# EAGLE board Main (EAGLE 6.3)
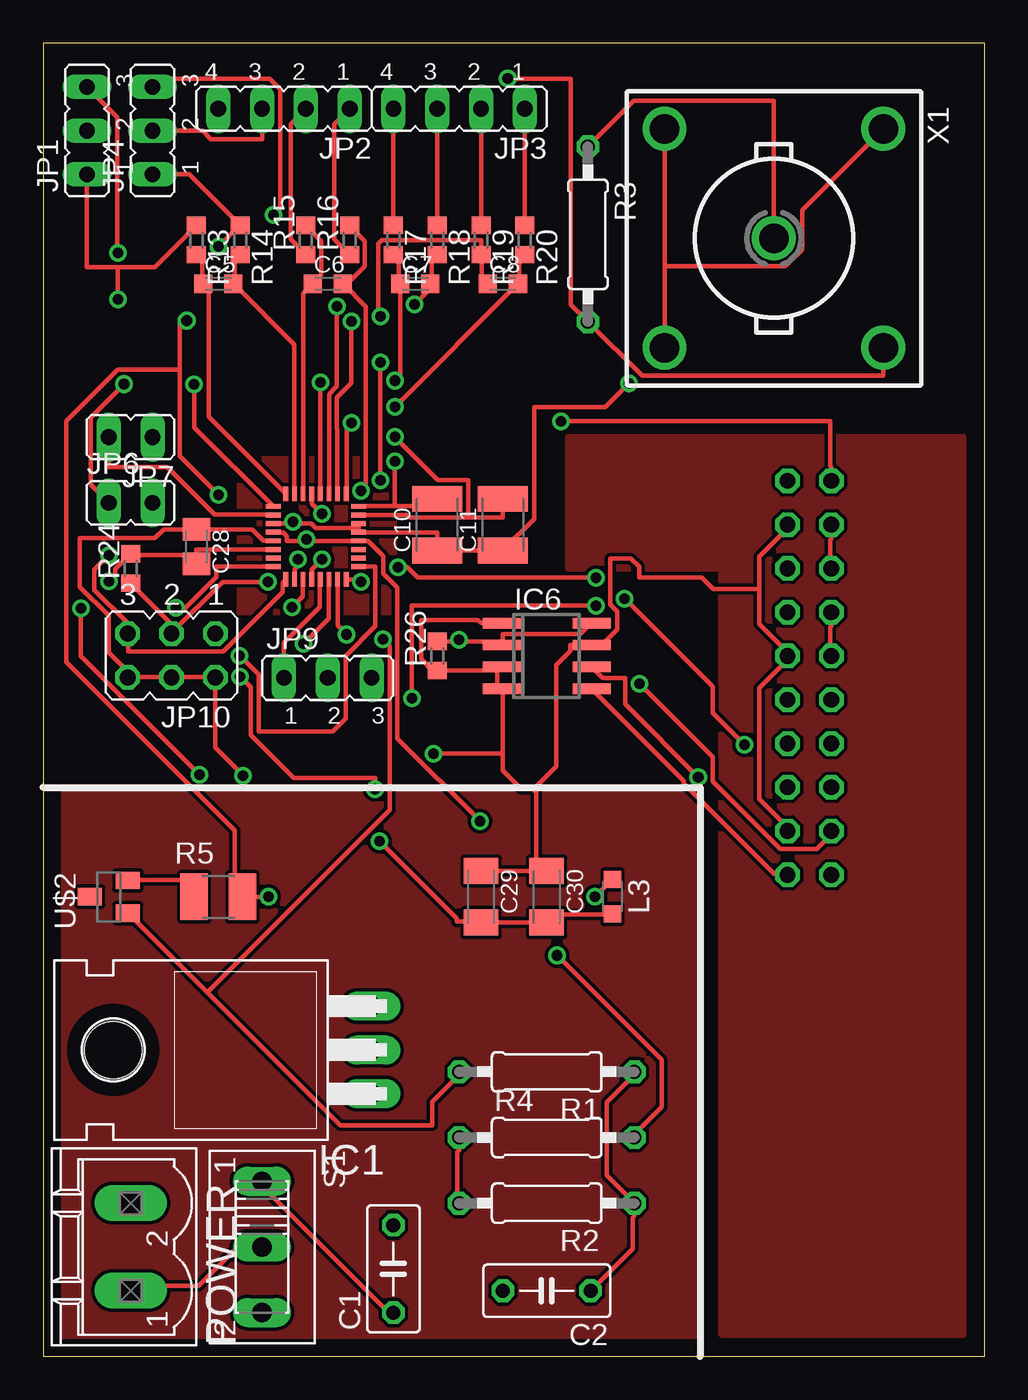
[diagram p0: board, top side]
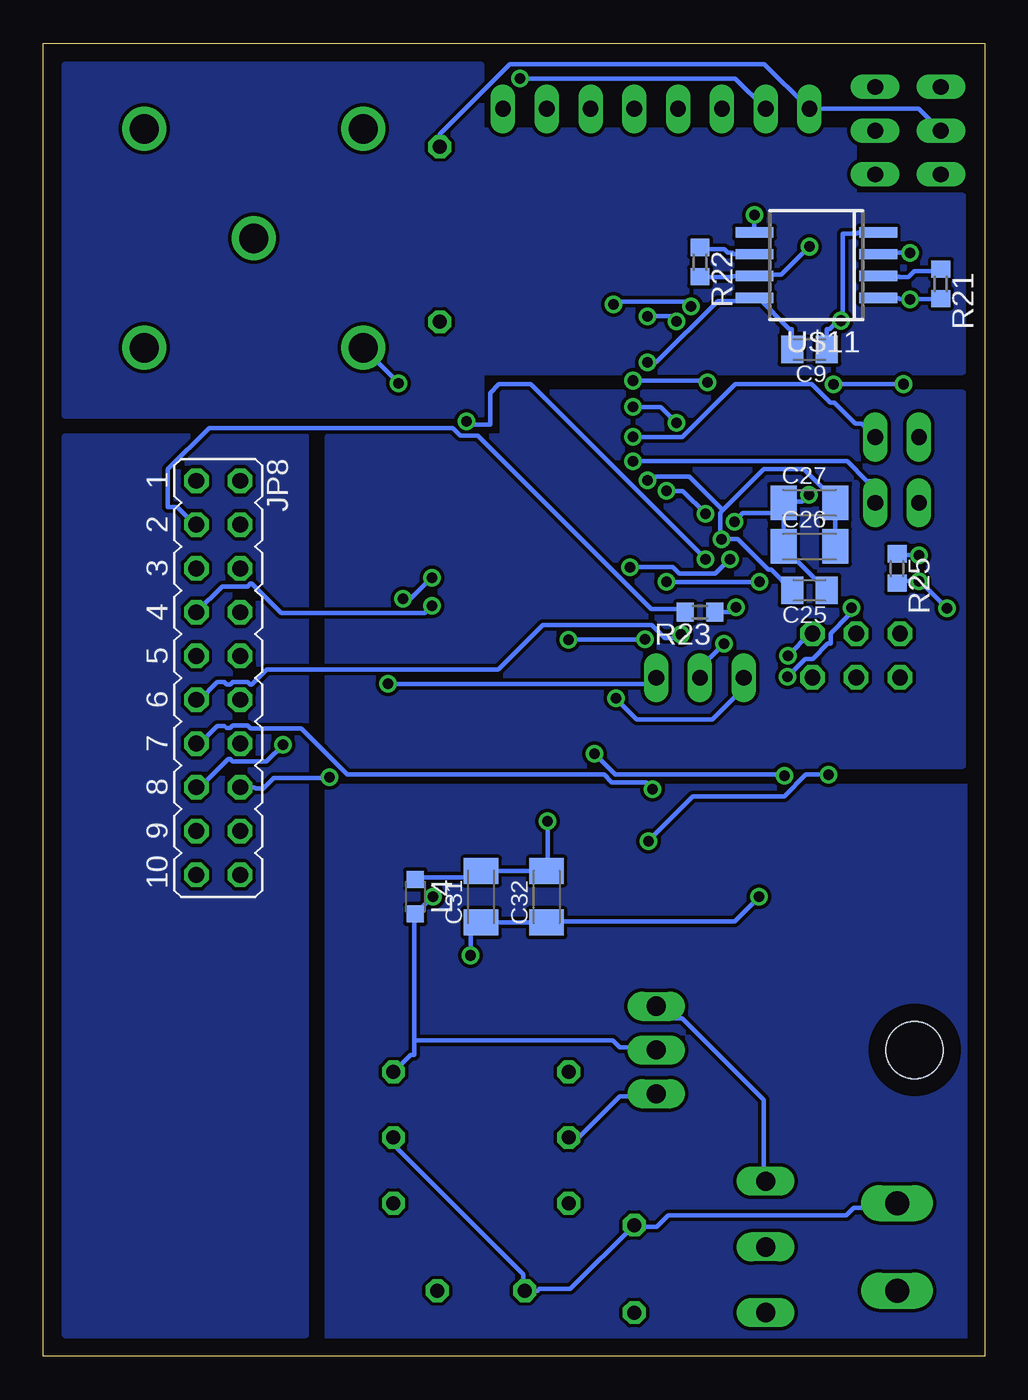
[diagram p1: board, bottom side, seen from below]

Size 54.61 x 76.2 mm. Coordinates in mm from the lower left corner, seen from the top.
Outline: 0,0 54.61,0 54.61,76.2 0,76.2 0,0
Copper layers (1*16): Top 0.035mm / dielectric 1.5mm / Bottom 0.035mm
Design rules "default": minimum track width 10mil, minimum drill 24mil, track to track 8mil, track to pad 8mil, pad to pad 8mil, via to via 8mil, smd to smd 8mil, copper to edge 40mil, drill to drill 8mil, minimum pad ring 10mil, minimum via ring 8mil, stop-mask expansion 4mil, vias tented up to drill 0mil, thermal gap 10mil

## Footprints (pad centres in the part's own frame; a part is rotated, then mirrored left to right if it is on the bottom)
C050-030X075 = drill 0.813 octagon: 1 -2.54,0; 2 2.54,0
C0603K = smd 1.05 x 1.08: 1 -0.875,0; 2 0.875,0
C0805K = smd 1.3 x 1.6: 1 -1,0; 2 1,0
C1210K = smd 1.5 x 2.9: 1 -1.5,0; 2 1.5,0
C1206K = smd 1.5 x 2: 1 -1.5,0; 2 1.5,0
TO220H = drill 1.118 long: 1 -2.54,-10.16; 2 0,-10.16; 3 2.54,-10.16 | hole 3.302: 0,4.826
SO-08 = smd 0.6 x 2.2: 1 -1.905,-2.6; 2 -0.635,-2.6; 3 0.635,-2.6; 4 1.905,-2.6; 5 1.905,2.6; 6 0.635,2.6; 7 -0.635,2.6; 8 -1.905,2.6
JP2 = drill 0.914 long: 1 -2.54,0; 2 0,0; 3 2.54,0
JP4 = drill 0.914 long: 1 -3.81,0; 2 -1.27,0; 3 1.27,0; 4 3.81,0
JP1 = drill 0.914 long: 1 0,-1.27; 2 0,1.27
JP10Q = drill 0.914 octagon: 1 -11.43,-1.27; 2 -11.43,1.27; 3 -8.89,-1.27; 4 -8.89,1.27; 5 -6.35,-1.27; 6 -6.35,1.27; 7 -3.81,-1.27; 8 -3.81,1.27; 9 -1.27,-1.27; 10 -1.27,1.27; 11 1.27,-1.27; 12 1.27,1.27; 13 3.81,-1.27; 14 3.81,1.27; 15 6.35,-1.27; 16 6.35,1.27; 17 8.89,-1.27; 18 8.89,1.27; 19 11.43,-1.27; 20 11.43,1.27
JP3Q = drill 0.914 octagon: 1 -2.54,-1.27; 2 -2.54,1.27; 3 0,-1.27; 4 0,1.27; 5 2.54,-1.27; 6 2.54,1.27
L2012C = smd 1 x 1: 1 -1,0; 2 1,0
MSTBV2 = drill 1.397 long: 1 -2.54,0; 2 2.54,0
0207/10 = drill 0.813 octagon: 1 -5.08,0; 2 5.08,0
R3225 = smd 1.6 x 2.7: 1 -1.4,0; 2 1.4,0
R0603 = smd 1 x 1.1: 1 -0.85,0; 2 0.85,0
255SB = drill 1.118 long: 1 -3.81,0; 2 0,0; 3 3.81,0
ADS8363 = smd 0.28 x 0.85: P$1_ 0.725,0.725; P$2_ 1.225,0.725; P$3_ 1.725,0.725; P$4_ 2.225,0.725; P$5_ 2.725,0.725; P$6_ 3.225,0.725; P$7_ 3.725,0.725; P$8_ 4.225,0.725; P$17_ 4.225,-4.225; P$18_ 3.725,-4.225; P$19_ 3.225,-4.225; P$20_ 2.725,-4.225; P$21_ 2.225,-4.225; P$22_ 1.725,-4.225; P$23_ 1.225,-4.225; P$24_ 0.725,-4.225 | smd 0.85 x 0.28: P$9_ 4.95,0; P$10_ 4.95,-0.5; P$11_ 4.95,-1; P$12_ 4.95,-1.5; P$13_ 4.95,-2; P$14_ 4.95,-2.5; P$15_ 4.95,-3; P$16_ 4.95,-3.5; P$25_ 0,-3.5; P$26_ 0,-3; P$27_ 0,-2.5; P$28_ 0,-2; P$29_ 0,-1.5; P$30_ 0,-1; P$31_ 0,-0.5; P$32_ 0,0
SOT23 = smd 1 x 1.4: 1 -0.95,-1.1; 2 0.95,-1.1; 3 0,1.1
SOP-08 = smd 0.6 x 2.2: 1 -1.905,-3.6; 2 -0.635,-3.6; 3 0.635,-3.6; 4 1.905,-3.6; 5 1.905,3.575; 6 0.635,3.575; 7 -0.635,3.575; 8 -1.905,3.575
B35N57 = drill 1.7: 1 0,0; 2 6.35,6.35; 3 -6.35,6.35; 4 -6.35,-6.35; 5 6.35,-6.35

## Placement (x,y rotation side)
C1  [C050-030X075]  20.32,5.08 90 top
C2  [C050-030X075]  29.21,3.81 180 top
C5  3900pF  [C0603K]  10.16,62.23 0 top
C6  3900pF  [C0603K]  16.51,62.23 0 top
C7  3900pF  [C0603K]  21.59,62.23 0 top
C8  3900pF  [C0603K]  26.67,62.23 0 top
C9  1uF  [C0805K]  10.16,58.42 180 bottom
C10  10uF  [C1210K]  22.86,48.26 90 top
C11  10uF  [C1210K]  26.67,48.26 90 top
C25  1uF  [C0805K]  10.16,44.45 180 bottom
C26  0.1uF  [C1206K]  10.16,46.99 0 bottom
C27  0.1uF  [C1206K]  10.16,49.53 0 bottom
C28  1uF  [C0805K]  8.89,46.99 270 top
C29  0.1uF  [C1206K]  25.4,26.67 270 top
C30  0.1uF  [C1206K]  29.21,26.67 270 top
C31  0.1uF  [C1206K]  29.21,26.67 90 bottom
C32  0.1uF  [C1206K]  25.4,26.67 90 bottom
IC1  317T  [TO220H]  8.89,17.78 90 top
IC6  24LC256T  [SO-08]  29.21,40.64 270 top
JP1  [JP2]  2.54,71.12 90 top
JP2  [JP4]  13.97,72.39 180 top
JP3  [JP4]  24.13,72.39 180 top
JP4  [JP2]  6.35,71.12 90 top
JP6  [JP1]  5.08,49.53 270 top
JP7  [JP1]  5.08,53.34 90 top
JP8  [JP10Q]  44.45,39.37 270 bottom
JP9  [JP2]  16.51,39.37 0 top
JP10  [JP3Q]  7.45,40.67 180 top
L3  [L2012C]  33.02,26.67 270 top
L4  [L2012C]  33.02,26.67 270 bottom
POWER  MSTBV2  [MSTBV2]  5.08,6.35 90 top
R1  150  [0207/10]  29.21,16.51 180 top
R2  240  [0207/10]  29.21,8.89 180 top
R3  1M  [0207/10]  31.6,65.1 270 top
R4  725  [0207/10]  29.21,12.7 0 top
R5  0  [R3225]  10.16,26.67 0 top
R13  49.9  [R0603]  8.89,64.77 270 top
R14  49.9  [R0603]  11.43,64.77 270 top
R15  49.9  [R0603]  15.24,64.77 90 top
R16  49.9  [R0603]  17.78,64.77 90 top
R17  49.9  [R0603]  20.32,64.77 270 top
R18  49.9  [R0603]  22.86,64.77 270 top
R19  49.9  [R0603]  25.4,64.77 270 top
R20  49.9  [R0603]  27.94,64.77 270 top
R21  49.9  [R0603]  2.54,62.23 270 bottom
R22  49.9  [R0603]  16.51,63.5 270 bottom
R23  33  [R0603]  16.51,43.18 180 bottom
R24  10K  [R0603]  5.08,45.72 90 top
R25  10K  [R0603]  5.08,45.72 270 bottom
R26  33  [R0603]  22.86,40.64 90 top
S1  [255SB]  12.7,6.35 270 top
U$1  ADS8386  [ADS8363]  13.35,49.32 0 top
U$2  LM4040  [SOT23]  3.81,26.67 90 top
U$11  OPA2365  [SOP-08]  9.77,63.32 90 bottom
X1  B35N57  [B35N57]  42.39,64.87 270 top

## Library data of the parts
C1 C2 L3 L4 R3 = resistor
C5-C11 C25-C32 R1 R2 R4 R5 R13-R26 = rcl
IC1 = linear
IC6 = microchip; MF: MICROCHIP; MPN: 24LC128-I/SNG; OC_FARNELL: 9757937; OC_NEWARK: 30H1511
JP1-JP4 JP6-JP10 = jumper
POWER = con-phoenix-508; MPN: MSTBV 2,5/2-GF-5.08; OC_FARNELL: 1792792; OC_NEWARK: 69R9845
S1 = switch
U$1 U$11 = ADC_Research
U$2 = SolarJackets_BMS
X1 = con-coax; OC_FARNELL: unknown; OC_NEWARK: unknown

## Nets
3.3V+: IC6.2 IC6.8 R1.2 R26.2 U$2.1
5V+: C9.2 C25.2 C26.2 C27.2 C31.2 C32.2 L4.1 U$1.P$13_ U$1.P$29_ U$11.8
D5V+: C28.2 C29.2 C30.2 L3.2 R24.2 R25.2 U$1.P$27_
DC+: POWER.1 S1.2
DGND0: C28.1 C29.1 C30.1 IC6.1 IC6.3 IC6.4 IC6.7 JP8.4 JP8.10 JP8.18 JP10.2 JP10.4 JP10.6 R26.1 U$1.P$28_
GND: R5.1 U$2.2
GND0: C1.2 C2.2 C9.1 C10.1 C11.1 C25.1 C26.1 C27.1 C31.1 C32.1 POWER.2 R4.2 R5.2 U$1.P$11_ U$1.P$12_ U$1.P$30_ U$11.4 X1.3 X1.4 X1.5
N$1: C5.1 R13.2 U$1.P$1_
N$2: C5.2 R14.2 U$1.P$2_
N$3: C6.1 R15.2 U$1.P$3_
N$4: C6.2 R16.2 U$1.P$4_
N$5: C7.1 R17.2 U$1.P$5_
N$6: C7.2 R18.2 U$1.P$6_
N$8: C8.1 R19.2 U$1.P$7_
N$9: C8.2 R20.2 U$1.P$8_
N$10: JP1.1 R13.1 R21.2 U$11.1
N$11: R21.1 U$11.2
N$13: JP1.3 U$11.3
N$15: C2.1 IC1.2 L3.1 L4.2 R1.1 R2.1
N$16: JP4.1 R14.1 R22.2 U$11.7
N$17: R22.1 U$11.6
N$18: JP4.3 U$11.5
N$21: JP2.2 R15.1
N$22: JP2.1 R16.1
N$23: JP3.4 R17.1
N$24: JP3.3 R18.1
N$25: JP3.2 R19.1
N$26: JP3.1 R20.1
N$27: C10.2 JP6.2 U$1.P$9_
N$28: JP6.1 U$1.P$32_
N$29: JP7.2 U$1.P$31_
N$30: C11.2 JP7.1 U$1.P$10_
N$31: JP8.1 U$1.P$21_
N$32: R23.1 U$1.P$22_
N$33: JP8.3 JP8.5 R23.2
N$34: JP8.7 JP8.9 JP9.1 U$1.P$20_
N$35: JP8.11 U$1.P$18_
N$36: JP8.13 U$1.P$25_
N$37: JP8.15 U$1.P$23_
N$38: JP9.2 U$1.P$19_
N$39: JP8.17 JP9.3
N$40: JP10.1 U$1.P$16_
N$41: JP10.3 R24.1 U$1.P$17_
N$42: JP10.5 R25.1 U$1.P$24_
N$43: IC6.5 JP8.20
N$44: IC6.6 JP8.16
N$46: C1.1 IC1.3 S1.1
N$47: IC1.1 R2.2 R4.1
SIGNALGND: JP2.3 JP4.2 R3.2 X1.2
SIGNALV+: JP1.2 JP2.4 R3.1 X1.1

## Tracks (layer width: path | path; a pad name or v marks a point on that pad's centre or on a via)
3.3V+  (via drill 0.61)
  Top 0.254: 26.59,41.48 24.13,41.48 | 24.13,41.48 22.86,41.48 R26.2 | 26.59,41.48 26.59,41.27 IC6.2 | IC6.8 31.17,41.91 26.67,41.91 26.67,41.58 26.59,41.48 | 9.51,21.12 17.22,13.41 22.58,13.41 22.58,14.78 24.13,16.33 R1.2 | 9.51,21.12 4.93,25.7 U$2.1 | v19.71,41.6 20.09,41.22 20.09,31.7 9.51,21.12 | v24.13,41.58 24.13,41.48
  Bottom 0.254: v24.13,41.58 24.11,41.6 v19.71,41.6
5V+  (via drill 0.61)
  Top 0.254: 15.27,47.32 14.12,47.32 14.12,47.6 13.92,47.8 13.36,47.8 U$1.P$29_ | 15.27,47.32 18.29,47.32 U$1.P$13_ 18.41,47.3 18.87,47.3 19.74,46.43 19.74,45.41 20.55,44.6 20.55,35.87 v25.35,31.06 | v15.27,47.42 15.27,47.32 | v19.56,50.83 v19.56,57.68
  Bottom 0.254: L4.1 33.02,27.69 32.92,27.79 29.59,27.79 C31.2 29.11,28.17 C32.2 25.35,28.3 v25.35,31.06 | C9.2 11.18,58.42 11.18,59.61 11.33,59.61 13.11,61.39 13.34,61.39 U$11.8 13.46,61.37 13.59,61.24 15.49,61.24 19.05,57.68 v19.56,57.68 | C26.2 C27.2 8.74,49.63 8.74,50.39 9.4,50.39 10.49,51.49 12.8,51.49 15.18,49.11 | C25.2 11.18,44.45 12.37,45.64 12.55,45.64 14.33,47.42 v15.27,47.42 15.34,47.52 15.34,48.95 15.18,49.11 | v19.56,50.83 19.33,51.05 17.12,51.05 15.18,49.11
D5V+  (via drill 0.61)
  Top 0.254: L3.2 33.02,25.65 29.21,25.65 C30.2 29.11,25.17 C29.2 25.3,25.25 24,25.25 24,25.4 v19.51,29.9 | v3.81,44.98 4.19,45.36 4.19,45.67 5.08,46.56 R24.2 5.18,46.48 8.79,46.48 C28.2 8.89,46.81 13.34,46.81 U$1.P$27_ | v9.07,33.76 2.18,40.64 v2.18,43.41
  Bottom 0.254: R25.2 5.08,44.88 4.98,44.98 v3.81,44.98 3.71,44.91 3.68,44.91 v2.18,43.41 | v19.51,29.9 16.92,32.49 11.63,32.49 10.36,33.76 v9.07,33.76
DC+
  Top 0.254: S1.2 11.15,6.35 11.15,6.22 9.02,4.09 5.08,4.09 POWER.1
DGND0  (via drill 0.61)
  Top 0.254: JP8.18 43.18,30.68 41.53,32.33 41.53,38.79 43.18,40.44 JP8.10 43.18,40.84 41.53,42.49 41.53,44.53 | JP8.4 43.18,48.06 41.53,46.41 41.53,44.53 | U$1.P$28_ 13.34,47.35 12.78,47.35 12.14,47.98 C28.1 8.79,47.98 6.99,47.98 6.48,47.47 2.13,47.47 2.13,44.65 3.81,42.98 3.81,40.84 4.9,39.75 4.9,39.52 JP10.6 4.93,39.42 7.44,39.42 JP10.4 7.57,39.42 9.98,39.42 JP10.2 9.98,39.27 9.98,35.33 v11.61,33.71 | C29.1 C30.1 28.6,28.27 28.6,32.74 28.52,32.82 28.45,32.92 | 26.34,39.8 26.39,39.8 26.39,39.98 26.42,40.01 IC6.3 | 26.34,39.8 22.86,39.8 R26.1 22.76,39.8 22.58,39.8 21.92,40.46 21.92,42.72 25.22,42.72 25.4,42.55 IC6.1 | 26.34,39.8 26.34,38.73 IC6.4 26.67,38.63 26.67,34.98 | 28.45,32.92 29.77,34.24 29.77,40.11 30.58,40.92 30.58,41.27 IC6.7 32.41,41.27 33.3,42.16 33.3,43.2 32.89,43.61 32.89,46.3 34.09,46.3 34.57,45.82 34.57,45.19 38.2,45.19 38.86,44.53 41.53,44.53 | 28.45,32.92 27.74,32.92 26.67,33.98 26.67,34.98 | 26.67,34.98 v22.63,34.98
  Bottom 0.254: v11.61,33.71 11.66,33.76 21.41,33.76 v22.63,34.98
GND
  Top 0.254: U$2.2 4.93,27.64 8.74,27.64 8.74,26.67 R5.1
GND0  (via drill 0.61)
  Top 0.254: v13.08,26.67 R5.2 11.51,26.77 11.12,27.15 11.12,30.5 1.35,40.28 1.35,54.25 4.34,57.25 7.92,57.25 | v29.82,23.27 35.89,17.2 35.89,14.48 34.29,12.88 R4.2 | 36.04,63.25 36.04,71.2 X1.4 | 36.04,63.25 X1.5 | 36.04,63.25 43.05,63.25 44.02,64.21 44.02,66.5 48.72,71.2 X1.3 | 18.31,48.06 18.31,48.31 U$1.P$11_ | 18.31,48.06 18.31,47.83 U$1.P$12_ 18.44,47.8 22.86,47.8 C10.1 22.96,46.76 C11.1 26.75,46.86 28.47,48.59 28.47,55.09 32.61,55.09 v33.98,56.46 | 14.5,48.34 15.54,48.34 15.82,48.06 18.31,48.06 | 14.5,48.34 13.36,48.34 U$1.P$30_ | v14.5,48.44 14.5,48.34 | v8.33,60.1 7.92,60.1 7.92,57.25 | 7.92,57.25 7.92,52.25 v10.19,49.99
  Bottom 0.254: v13.08,26.67 14.5,25.25 25.3,25.25 C32.1 C31.1 29.26,25.04 29.82,24.49 v29.82,23.27 | R4.2 34.29,12.17 34.16,12.17 26.77,4.78 26.77,3.91 26.75,3.91 C2.2 25.93,3.81 25.83,3.91 24.03,3.91 C1.2 20.24,7.52 19.02,7.52 18.36,8.18 8.03,8.18 7.59,8.61 5.36,8.61 POWER.2 | 8.42,60.19 8.23,60.38 8.23,65.15 7.42,65.15 7.37,65.2 6.2,65.2 U$11.4 | 8.42,60.19 8.99,59.61 9.14,59.61 9.14,58.42 C9.1 | C25.1 11.66,46.94 C26.1 11.66,47.09 C27.1 | v14.5,48.44 14.02,48.92 11.76,48.92 C27.1 | v10.19,49.99 10.57,49.61 11.56,49.61 C27.1 | v8.33,60.1 8.42,60.19 | v33.98,56.46 36.02,58.5 X1.5
N$1
  Top 0.254: U$1.P$1_ 14.07,50.06 9.6,54.53 9.6,61.92 C5.1 9.22,62.33 9.22,63.58 8.89,63.91 R13.2
N$2
  Top 0.254: U$1.P$2_ 14.58,50.06 14.58,58.7 C5.2 11.12,62.33 11.12,63.6 11.43,63.91 R14.2
N$3
  Top 0.254: U$1.P$3_ 15.09,50.06 15.09,61.7 15.62,62.23 C6.1 15.7,62.33 16.13,62.76 16.13,64.72 15.24,65.61 R15.2
N$4  (via drill 0.61)
  Top 0.254: v16.18,48.9 15.6,49.48 15.6,50.04 U$1.P$4_ | v18.44,50.22 18.72,50.49 18.72,60.91 C6.2 17.6,62.2 18.67,63.27 18.67,64.72 17.78,65.61 R16.2
  Bottom 0.254: v16.18,48.9 17.5,50.22 v18.44,50.22
N$5  (via drill 0.61)
  Top 0.254: v16.08,56.52 16.08,50.06 U$1.P$5_ | v20.4,56.62 20.7,56.92 C7.1 20.62,62.33 20.62,63.6 20.32,63.91 R17.2
  Bottom 0.254: v16.08,56.52 16.18,56.62 v20.4,56.62
N$6  (via drill 0.61)
  Top 0.254: v17.04,60.94 17.04,56.29 16.59,55.83 16.59,50.06 U$1.P$6_ | v21.54,61.04 22.45,61.95 C7.2 22.53,62.33 22.53,63.58 22.86,63.91 R18.2
  Bottom 0.254: v17.04,60.94 17.3,61.19 21.39,61.19 v21.54,61.04
N$8  (via drill 0.61)
  Top 0.254: v17.88,60.05 17.88,56.46 17.04,55.63 17.04,53.82 17.07,53.8 17.07,50.06 U$1.P$7_ | v19.56,60.35 19.43,60.48 19.43,64.57 19.63,64.77 25.4,64.77 R19.2 25.45,63.8 25.45,62.56 25.78,62.23 C8.1
  Bottom 0.254: v17.88,60.05 18.19,60.35 v19.56,60.35
N$9  (via drill 0.61)
  Top 0.254: v17.88,54.18 17.6,53.9 17.6,50.06 U$1.P$8_ | v20.4,55.09 27.53,62.23 C8.2 27.61,62.33 27.61,63.58 27.94,63.91 R20.2
  Bottom 0.254: v17.88,54.18 18.8,55.09 v20.4,55.09
N$10  (via drill 0.61)
  Top 0.254: 4.34,63.2 2.54,63.2 JP1.1 | 4.34,63.2 6.48,63.2 8.89,65.61 R13.1 | 4.34,63.2 v4.34,61.34
  Bottom 0.254: R21.2 2.54,61.37 2.56,61.34 v4.34,61.34 4.93,61.34 4.98,61.39 6.17,61.39 U$11.1
N$11
  Bottom 0.254: R21.1 2.54,63.07 2.64,62.97 4.09,62.97 4.45,62.61 4.93,62.61 4.98,62.66 6.17,62.66 U$11.2
N$12
  pour Bottom: 29.21,74.93 53.34,74.93 53.34,54.61 29.21,54.61 29.21,57.15 1.27,57.15 1.27,67.31 29.21,67.31
  pour Bottom: 29.21,67.31 29.21,71.12 7.62,71.12 7.62,67.31
N$13  (via drill 0.61)
  Top 0.254: v4.34,64.03 4.29,64.08 4.29,71.91 JP1.3
  Bottom 0.254: v4.34,64.03 6.1,64.03 U$11.3
N$15  (via drill 0.61)
  Top 0.254: C2.1 34.19,6.25 34.19,8.05 34.29,8.15 R2.1 34.21,8.99 32.69,10.52 32.69,14.73 34.29,16.33 R1.1 | v32,26.67 33.02,27.69 L3.1
  Bottom 0.254: v32,26.67 32.03,26.67 L4.2 33.07,25.55 33.07,18.34 | 33.07,18.34 33.07,17.5 33.27,17.5 34.27,16.51 R1.1 | IC1.2 19.2,17.93 21.16,17.93 21.57,18.34 33.07,18.34
N$16  (via drill 0.61)
  Top 0.254: JP4.1 8.48,68.58 11.43,65.63 R14.1 11.33,65.56 v10.16,64.39
  Bottom 0.254: R22.2 16.51,62.64 16.48,62.61 14.63,62.61 14.55,62.69 U$11.7 13.23,62.71 13.18,62.76 11.79,62.76 v10.16,64.39
N$17
  Bottom 0.254: R22.1 16.51,64.34 16.41,64.24 15.11,64.24 14.91,64.03 14.63,64.03 14.55,63.96 U$11.6
N$18  (via drill 0.61)
  Top 0.254: v13.36,66.24 13.74,66.62 13.74,73.53 13.13,74.14 6.35,74.14 JP4.3
  Bottom 0.254: v13.36,66.24 U$11.5
N$20
  pour Bottom: 1.27,55.88 27.94,55.88 27.94,53.34 38.1,53.34 38.1,34.29 1.27,34.29
N$21
  Top 0.254: JP2.2 14.35,71.5 14.35,64.82 15.24,63.93 R15.1
N$22
  Top 0.254: JP2.1 16.89,71.5 16.89,64.82 17.78,63.93 R16.1
N$23
  Top 0.254: JP3.4 R17.1
N$24
  Top 0.254: JP3.3 R18.1
N$25
  Top 0.254: JP3.2 R19.1
N$26
  Top 0.254: JP3.1 R20.1
N$27  (via drill 0.61)
  Top 0.254: 20.4,49.33 22.86,49.33 C10.2 | 20.4,49.33 18.31,49.33 U$1.P$9_ | 20.4,49.33 v20.4,51.94
  Bottom 0.254: JP6.2 6.35,50.8 6.83,50.8 7.98,51.94 v20.4,51.94
N$28  (via drill 0.61)
  Top 0.254: v8.76,56.39 8.76,53.9 13.34,49.33 U$1.P$32_ | v4.7,56.41 2.77,54.48 2.77,50.57 JP6.1
  Bottom 0.254: v8.76,56.39 8.74,56.41 v4.7,56.41
N$29
  Top 0.254: JP7.2 3.81,51.59 7.21,51.59 9.96,48.84 13.34,48.84 U$1.P$31_
N$30  (via drill 0.61)
  Top 0.254: 24.66,48.67 26.67,48.67 C11.2 | 24.66,48.67 21.29,48.67 21.13,48.82 18.31,48.82 U$1.P$10_ | v20.4,53.34 22.89,50.85 24.66,50.85 24.66,48.67
  Bottom 0.254: JP7.1 7.14,54.13 7.52,54.13 8.74,55.35 8.97,55.35 10.03,56.41 14.45,56.41 17.53,53.34 v20.4,53.34
N$31  (via drill 0.61)
  Top 0.254: v16.18,46.25 15.57,45.64 U$1.P$21_ | v30.05,54.25 45.64,54.25 45.64,51.69 45.72,51.61 JP8.1
  Bottom 0.254: v16.18,46.25 26.34,56.41 28.17,56.41 28.68,55.91 28.68,54.08 29.87,54.08 v30.05,54.25
N$32  (via drill 0.61)
  Top 0.254: v14.43,43.46 15.06,44.09 15.06,45.09 U$1.P$22_
  Bottom 0.254: v14.43,43.46 14.71,43.18 R23.1
N$33
  Top 0.254: JP8.5 45.64,45.8 45.64,47.37 45.72,47.45 JP8.3
  Bottom 0.254: JP8.3 45.82,48.26 46.84,49.28 47.37,49.28 47.37,51.49 44.98,53.87 30.86,53.87 30.4,53.42 29.39,53.42 19.33,43.36 17.55,43.36 17.37,43.18 R23.2
N$34  (via drill 0.61)
  Top 0.254: JP8.9 45.64,40.72 45.64,42.29 45.72,42.37 JP8.7 | JP9.1 13.97,41.4 16.05,43.48 16.05,45.09 U$1.P$20_ | v32.05,43.56 21.39,43.56 v21.39,38.18
  Bottom 0.254: JP8.7 44.22,44.68 42.75,44.68 42.6,44.83 42.49,44.83 40.79,43.13 32.49,43.13 v32.05,43.56 | v21.39,38.18 20.17,36.96 15.8,36.96 13.97,38.79 JP9.1
N$35  (via drill 0.61)
  Top 0.254: v17.6,41.88 17.09,42.39 17.09,45.09 U$1.P$18_
  Bottom 0.254: v17.6,41.88 17.8,41.68 18.54,41.68 19.3,42.44 25.63,42.44 28.22,39.85 41.63,39.85 42.49,38.99 42.6,38.99 42.75,39.14 43.61,39.14 43.76,38.99 43.97,38.99 44.09,39.12 44.5,39.12 45.52,38.1 JP8.11
N$36  (via drill 0.61)
  Top 0.254: v7.72,43.43 8.26,43.43 10.03,45.21 10.03,45.82 13.34,45.82 U$1.P$25_ | v11.43,39.45 12.04,38.84 12.04,36.04 14.53,33.55 19.25,33.55 v19.25,32.92
  Bottom 0.254: v7.72,43.43 7.72,43 7.87,43 8.94,41.94 8.94,41.35 9.09,41.35 9.98,40.46 10.41,40.46 v11.43,39.45 | v19.25,32.92 19.63,33.3 21.61,33.3 22.07,33.76 36.96,33.76 39.62,36.42 42.57,36.42 42.75,36.6 43.61,36.6 43.76,36.45 43.97,36.45 44.09,36.58 44.5,36.58 45.52,35.56 JP8.13
N$37  (via drill 0.61)
  Top 0.254: v14.78,46.25 14.78,45.85 14.61,45.67 14.61,45.14 U$1.P$23_ | v20.57,45.8 21.13,45.8 21.74,45.19 v32.05,45.19 | v33.73,43.97 38.84,38.86 38.84,37.34 v40.69,35.48
  Bottom 0.254: v14.78,46.25 15.62,45.41 17.7,45.41 18.09,45.8 v20.57,45.8 | v32.05,45.19 33.27,43.97 v33.73,43.97 | v40.69,35.48 41.66,34.52 43.61,34.52 43.76,34.67 43.87,34.67 45.52,33.02 JP8.15
N$38  (via drill 0.61)
  Top 0.254: v15.11,41.35 16.56,42.8 16.56,45.09 U$1.P$19_
  Bottom 0.254: v15.11,41.35 16.51,39.95 JP9.2
N$39  (via drill 0.61)
  Top 0.254: v34.59,39.01 38.84,34.77 38.84,33.35 42.75,29.44 44.91,29.44 44.91,29.46 45.72,30.28 JP8.17
  Bottom 0.254: JP9.3 19.41,39.01 v34.59,39.01
N$40  (via drill 0.61)
  Top 0.254: v11.4,40.66 12.5,39.57 12.5,36.25 16.79,36.25 17.55,37.01 17.55,40.64 19.28,42.37 19.28,45.82 18.31,45.82 U$1.P$16_
  Bottom 0.254: v11.4,40.66 10.13,41.94 10.01,41.94 JP10.1
N$41  (via drill 0.61)
  Top 0.254: v18.44,44.96 18.44,45.09 17.6,45.09 U$1.P$17_ | v13.06,44.93 10.41,44.93 7.47,41.99 7.47,41.96 JP10.3 7.62,42.32 5.08,44.86 R24.1
  Bottom 0.254: v18.44,44.96 18.41,44.93 v13.06,44.93
N$42  (via drill 0.61)
  Top 0.254: U$1.P$24_ 14.07,45.09 13.89,44.91 13.89,44.35 10.44,40.89 4.93,40.89 4.93,41.94 JP10.5 4.88,42.06 4.88,42.57 2.97,44.48 2.97,45.64 v3.81,46.48
  Bottom 0.254: v3.81,46.48 5,46.48 5.08,46.56 R25.1
N$43
  Top 0.254: JP8.20 43.18,27.99 42.42,27.99 37.16,33.25 37.16,33.4 31.83,38.73 IC6.5
N$44  (via drill 0.61)
  Top 0.254: v38,33.6 33.76,37.85 33.76,39.37 32.46,39.37 31.83,40.01 IC6.6
  Bottom 0.254: v38,33.6 38.05,33.55 41.22,33.55 41.83,32.94 42.29,32.94 42.37,33.02 JP8.16
N$45
  pour Bottom: 0,33.02 38.1,33.02 38.1,0 0,0
N$46
  Top 0.254: C1.1 19.79,2.54 19.79,2.79 12.7,9.88 S1.1
  Bottom 0.254: IC1.3 18.34,19.61 17.53,19.61 12.8,14.88 12.8,10.16 S1.1
N$47
  Top 0.254: R2.2 24.03,8.99 24.03,11.86 24.13,11.96 R4.1
  Bottom 0.254: IC1.1 19.2,15.09 21.16,15.09 23.55,12.7 R4.1
N$48
  pour Top: 0,33.02 38.1,33.02 38.1,0 0,0
N$49
  pour Bottom: 39.37,53.34 53.34,53.34 53.34,1.27 39.37,1.27
N$50
  pour Top: 30.48,53.34 53.34,53.34 53.34,1.27 39.37,1.27 39.37,44.45 39.37,45.72 30.48,45.72
N$51
  pour Top: 11.43,52.07 20.32,52.07 20.32,43.18 11.43,43.18
SIGNALGND  (via drill 0.61)
  Top 0.254: JP4.2 9.25,71.12 9.73,70.64 12.7,70.64 JP2.3 | X1.2 48.72,58.5 48.72,56.9 34.75,56.9 31.62,60.02 R3.2 31.52,60.12 30.61,61.04 30.61,74.14 v26.95,74.14
  Bottom 0.254: JP2.3 14.45,74.14 v26.95,74.14
SIGNALV+
  Top 0.254: R3.1 31.62,70.21 34.27,72.85 42.37,72.85 42.37,64.87 X1.1
  Bottom 0.254: JP1.2 3.81,72.39 JP2.4 10.26,72.47 12.78,74.98 27.53,74.98 31.6,70.92 31.6,70.21 R3.1